# Altium PCB display.PcbDoc
Units mm, origin at the board's own origin, x right, y up, seen from the top; angles counter-clockwise.
Board outline 96 x 26 mm, 2 copper layers (Top Layer, Bottom Layer); 17 components, 76 nets, 185 pads, 110 vias.
Unrouted connection lines stored in the file: 12.
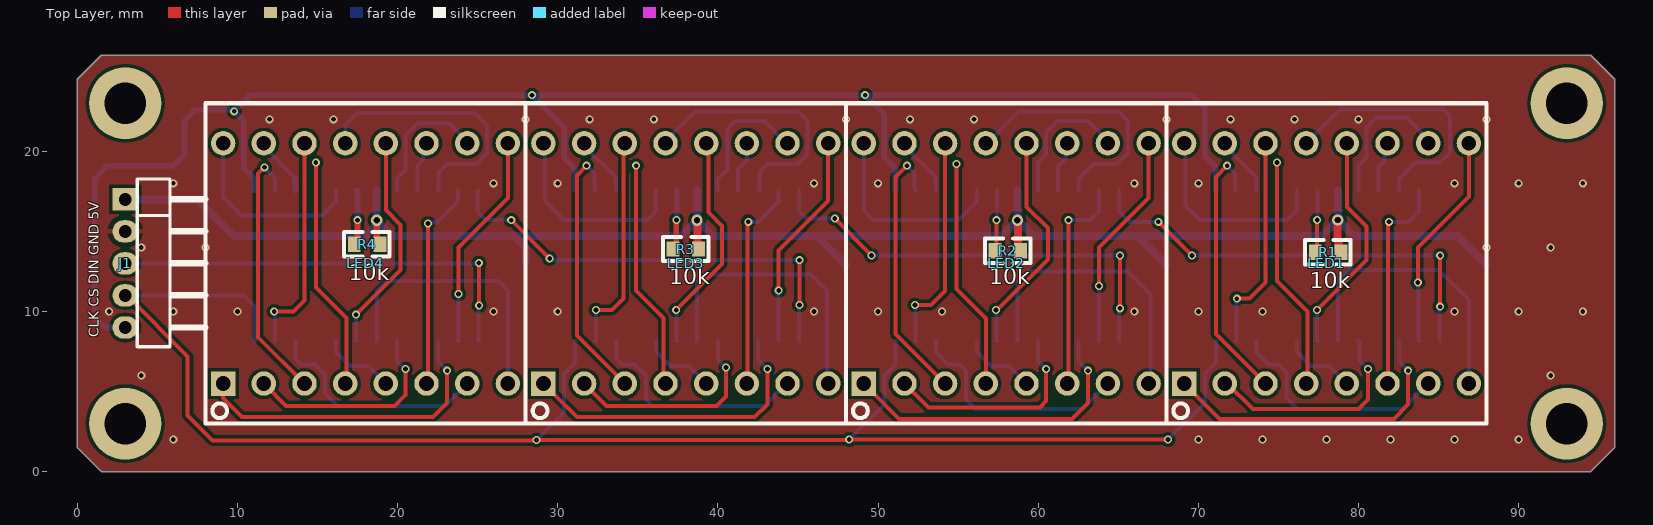
[diagram p0: Top Layer view]
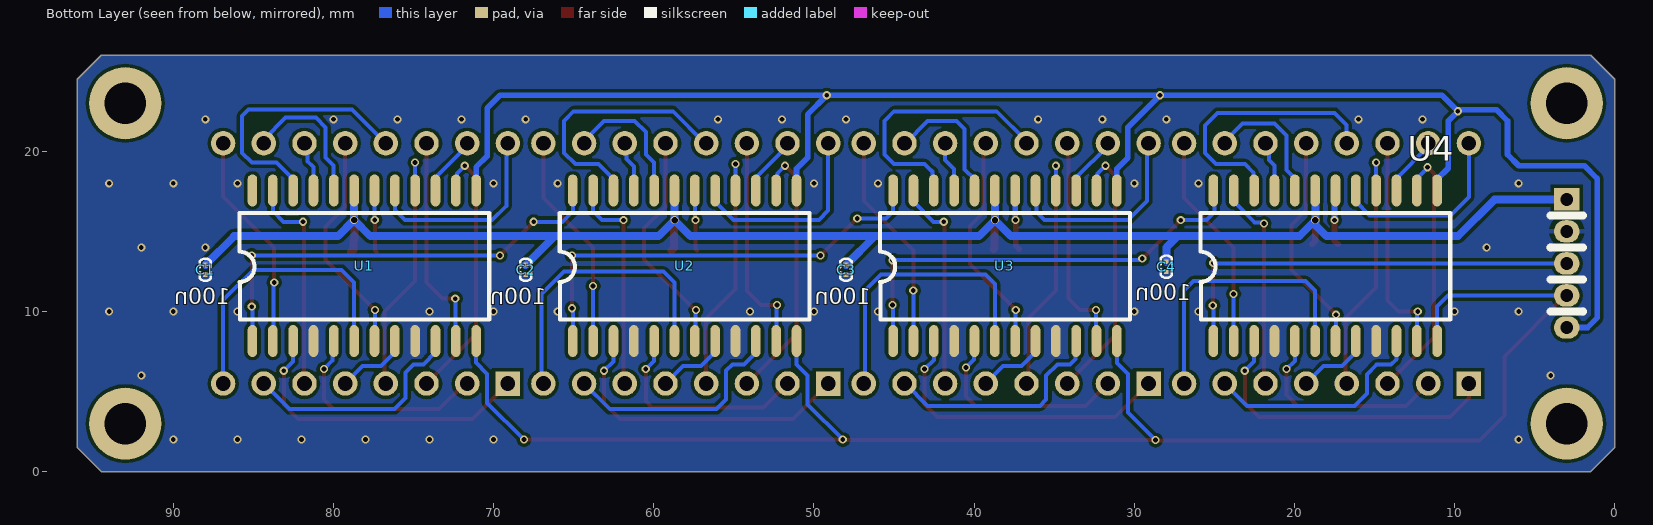
[diagram p1: Bottom Layer view, seen from below]
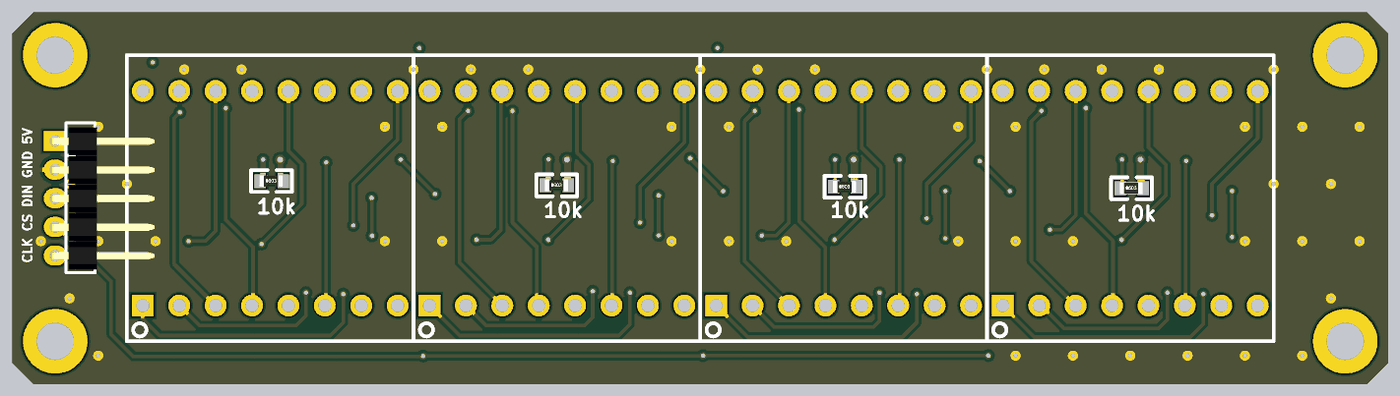
[diagram p2: 3D render of the assembled board from above, using the file's embedded part models]
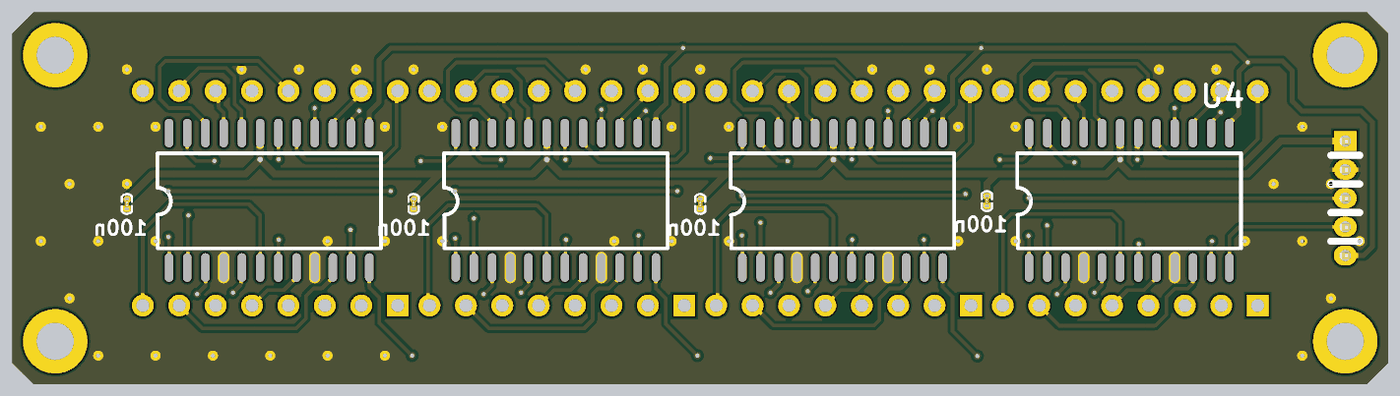
[diagram p3: 3D render of the assembled board from below, using the file's embedded part models]

## Layer stack, top to bottom
Top Solder: solder mask 0.0102, Solder Resist, Dk 3.5
Top Layer: signal copper 0.0356
Dielectric 1: dielectric 0.32, FR-4, Dk 4.8
Bottom Layer: signal copper 0.0356
Bottom Solder: solder mask 0.0102, Solder Resist, Dk 3.5

## Board outline
0,1.5 0,24.5 1.5,26 94.5,26 96,24.5 96,1.5 94.5,0 1.5,0

## Design rules (kind name [scope] priority, off if disabled: settings)
Clearance [All] p1: gap=0.2 ignorepadtopadclearanceinfootprint=FALSE except(0: Arc-Hole Track-Hole SMDPad-Hole THPad-Hole Via-Hole Fill-Hole Poly-Hole Region-Hole Text-Hole)
ComponentClearance [All] p1 off: gap=0.254 collisioncheckmode=3 verticalgap=0.254 showdistances=FALSE
HoleSize [All] p1: absolutevalues=TRUE maxlimit=10 minlimit=0.025 maxpercent=80.000 minpercent=20.000
HoleToHoleClearance [All] p1: gap=0.2 allowstackedmicrovias=TRUE
MinimumSolderMaskSliver [All] p1: minsoldermaskwidth=0.01
PolygonConnect PolygonConnect_2 [InNet('VIN')] p1: connectstyle=Direct reliefconductorwidth=0.254 reliefentries=4 polygonreliefangle="90 Angle" airgapwidth=0.254
PolygonConnect PolygonConnect_1 [IsVia] p2: connectstyle=Direct reliefconductorwidth=0.254 reliefentries=4 polygonreliefangle="90 Angle" airgapwidth=0.254
PolygonConnect [All] p3: thpad.connectstyle=Relief thpad.reliefconductorwidth=0.3 thpad.reliefentries=4 thpad.polygonreliefangle="90 Angle" thpad.airgapwidth=0.3 smdpad.connectstyle=Direct smdpad.reliefconductorwidth=0.2 smdpad.reliefentries=4 smdpad.polygonreliefangle="90 Angle" smdpad.airgapwidth=0.2 via.connectstyle=Relief via.reliefconductorwidth=0.2 via.reliefentries=4 via.polygonreliefangle="90 Angle" via.airgapwidth=0.2
RoutingVias [All] p1: holewidth=0.3 width=0.5 viastyle="Through Hole" minholewidth=0.3 minwidth=0.5 maxholewidth=0.711 maxwidth=1.27
SilkToSilkClearance [All] p1: silktosilkclearance=0
SilkToSolderMaskClearance [IsPad] p1: minsilkscreentomaskgap=0 clearancetoexposedcopper=TRUE
SolderMaskExpansion [All] p1: expansion=0.102 istentingtop=FALSE
Width Width_VIN [InNet('VIN')] p1: maxlimit=10 minlimit=0.254 preferedwidth=1
Width Width_5V [InNet('5V')] p2: maxlimit=5 minlimit=0.2 preferedwidth=0.5
Width Width_3V3 [InNet('3V3')] p3: maxlimit=5 minlimit=0.2 preferedwidth=0.35
Width Width_1 [All] p4: maxlimit=1 minlimit=0.2 preferedwidth=0.25
24 further rules are at their usual default settings.

## Components (designator, comment, footprint, x,y, rotation, side; value= is the part's Value field where it differs from the comment)
C1 "100nF" 0201C 88,12.3 r90 bottom
C2 "100nF" 0201C 68,12.3 r90 bottom
C3 "100nF" 0201C 48,12.3 r90 bottom
C4 "100nF" 0201C 28,12.5 r90 bottom
J1 "Pin HDR1X5" "Pin HDR1X5/2mm-W" 3,17 r270 top
LED1 "SLD0888DWC1BY" 点阵2CM 78,13 r0 top
LED2 "SLD0888DWC1BY" 点阵2CM 58,13 r0 top
LED3 "SLD0888DWC1BY" 点阵2CM 38,13 r0 top
LED4 "SLD0888DWC1BY" 点阵2CM 18,13 r0 top
R1 "10k" 0603R 77.3,13.7 r0 top
R2 "10k" 0603R 57.3,13.8 r0 top
R3 "10k" 0603R 37.2,13.9 r0 top
R4 "10k" 0603R 17.3,14.2 r0 top
U1 "MAX7219EWG+T" MAX7219EWG 78,13 r180 bottom
U2 "MAX7219EWG+T" MAX7219EWG 58,13 r180 bottom
U3 "MAX7219EWG+T" MAX7219EWG 38,13 r180 bottom
U4 "MAX7219EWG+T" MAX7219EWG 18,13 r180 bottom

## Footprints (in the part's own frame and the unit in brackets; to place one, negate y for a bottom-side part, rotate by r counter-clockwise, add the part's x,y. Pads: shape width x height; smd on the part's side, far side on the other; paste and mask are expansions set on the pad)
0201C [mm]
  rect 0.3x0.3 smd: 1(0,0) 2(0.6,0)
  silkscreen extent -0.39,-0.35 0.99,0.35, body extent 0,-0.15 0.61,0.15, height 0.31
0603R [mm]
  rect 0.8x0.965 smd: 1(0,0) 2(1.6,0)
  silkscreen extent -0.63,-0.76 2.21,0.76, body extent -0.04,-0.41 1.56,0.41, height 0.45
MAX7219EWG [mm]
  oval 0.6x1.998 smd: 1(-7.059,-4.843) 2(-5.789,-4.843) 3(-4.519,-4.843) 4(-3.249,-4.843) 5(-1.979,-4.843) 6(-0.709,-4.843) 7(0.561,-4.843) 8(1.831,-4.843) 9(3.101,-4.843) 10(4.371,-4.843) 11(5.641,-4.843) 12(6.911,-4.843) 13(6.911,4.557) 14(5.641,4.557) 15(4.371,4.557) 16(3.101,4.557) 17(1.831,4.557) 18(0.561,4.557) 19(-0.709,4.557) 20(-1.979,4.557) 21(-3.249,4.557) 22(-4.519,4.557) 23(-5.789,4.557) 24(-7.059,4.557)
  silkscreen extent -7.87,-3.5 7.73,3.15
"Pin HDR1X5/2mm-W" [mm]
  rect 1.4x1.6 hole 0.8: 1(0,0)
  oval 1.4x1.6 hole 0.8: 2(2,0) 3(4,0) 4(6,0) 5(8,0)
  silkscreen extent -1.27,0.75 9.2,5, body extent -0.95,-0.32 9,6.93, height 2
点阵2CM [mil]
  rect 60x60 hole 36: 1(-350,-295.28)
  round 60 hole 36: 2(-250,-295.28) 3(-150,-295.28) 4(-50,-295.28) 5(50,-295.28) 6(150,-295.28) 7(250,-295.28) 8(350,-295.28) 9(350,295.27) 10(250,295.28) 11(150,295.28) 12(50,295.28) 13(-50,295.28) 14(-150,295.28) 15(-250,295.28) 16(-350,295.28)
  silkscreen extent -394,-394 394,394

## Part data
C1 C2 C3 C4: library part CAP, "无极性电容"
LED1 LED2 LED3 LED4: BOM_Manufacturer=SUNLIGHT, BOM_Manufacturer Part=SLD0888DWC1BY, BOM_Supplier=LCSC, BOM_Supplier Part=C225986, Contributor=LCSC, spicePre=L, spiceSymbolName=SLD0888DWC1BY
R1 R2 R3 R4: library part RES
U1 U2 U3 U4: BOM_JLCPCB SMD=Yes, BOM_Manufacturer=MAXIM, BOM_Manufacturer Part=MAX7219EWG+T, BOM_Supplier=LCSC, BOM_Supplier Part=C52476, image=//image.lceda.cn/szlcsc/C52476.jpg, SMT Type=Extend, spicePre=U, spiceSymbolName=MAX7219EWG+T

## Free pads (board coordinates)
  round 4.5 hole 2.6: 2(3,3) 2(3,23) 2(93,3) 2(93,23)

## Via types
v1: diameter 0.5/0.508 (per signal layer), hole 0.3, Top Layer to Bottom Layer, tented both sides, 56 vias
v2: diameter 0.5, hole 0.3, Top Layer to Bottom Layer, 50 vias
v3: diameter 0.7/0.508 (per signal layer), hole 0.4, Top Layer to Bottom Layer, tented both sides, 4 vias

## Nets (pads, with @x,y where several pads share a name; then routed paths per layer and width w, separated by ;. In a path a pad name is that pad's centre, name@x,y a point inside that pad or via, vN(x,y) a via of type N, cw(c..) or ccw(c..) an arc to the next point about the centre after c; other vN are vias at no path point)
1DIG0: LED1.9 U1.2 | length 13.7
  Top Layer w0.25: v1(83.7,11.8) 83.7,14 86.89,17.19 LED1.9
  Bottom Layer w0.25: v1(83.7,11.8) 83.744,11.756 83.744,8.201 U1.2
1DIG1: LED1.14 U1.11 | length 13.6
  Top Layer w0.25: v1(72.4,10.8) 73.2,10.8 74.2,11.8 74.2,20.49 LED1.14
  Bottom Layer w0.25: U1.11 72.379,8.178 72.379,10.779 v1(72.4,10.8)
1DIG2: LED1.8 U1.6 | length 18.2
  Bottom Layer w0.25: U1.6 78.709,11.809 79.5,12.6 85,12.6 86.89,10.71 LED1.8
1DIG3: LED1.12 U1.7 | length 14.2
  Top Layer w0.25: v1(77.4,10.1) 80.5,13.2 80.5,15.3 79.27,16.53 LED1.12
  Bottom Layer w0.25: v1(77.4,10.1) 77.419,10.081 77.419,8.176 U1.7
1DIG4: LED1.1 U1.3 | length 19.5
  Top Layer w0.25: LED1.1@69.11,5.5 71.31,3.3 82.2,3.3 83.1,4.2 v1(83.1,6.3)
  Bottom Layer w0.25: U1.3 82.519,6.881 v1(83.1,6.3)
1DIG5: LED1.7 U1.10 | length 14.5
  Bottom Layer w0.25: U1.10 73.629,7.458 74.387,6.7 75,6.7 75.5,6.2 75.5,4.6 76.2,3.9 82.75,3.9 LED1.7
1DIG6: LED1.2 U1.5 | length 13.8
  Top Layer w0.25: LED1.2 71.8,5.5 73.4,3.9 80,3.9 80.6,4.5 v1(80.6,6.4)
  Bottom Layer w0.25: U1.5 80.046,8.09 80.046,6.954 v1(80.6,6.4)
1DIG7: LED1.5 U1.8 | length 4.6
  Bottom Layer w0.25: U1.8 76.169,7.458 77.04,6.587 78.183,6.587 LED1.5
1SEGA: LED1.3 U1.14 | length 16.9
  Top Layer w0.25: v1(71.8,19.1) 71.1,18.4 71.1,8.59 LED1.3
  Bottom Layer w0.25: v1(71.8,19.1) 72.292,18.608 72.292,17.624 U1.14
1SEGB: LED1.4 U1.16 | length 16.4
  Top Layer w0.25: v1(74.9,19.3) 74.9,11.9 76.8,10 76.8,5.57 LED1.4
  Bottom Layer w0.25: U1.16 74.899,19.299 v1(74.9,19.3)
1SEGC: LED1.10 U1.20 | length 9.1
  Bottom Layer w0.25: U1.20 80,17.578 80,19.1 80.5,19.6 80.5,21.5 81.1,22.1 83,22.1 84.35,20.75 LED1.10
1SEGD: LED1.6 U1.23 | length 13.6
  Top Layer w0.25: LED1.6 81.855,5.545 81.855,15.555 v1(81.9,15.6)
  Bottom Layer w0.25: v1(81.9,15.6) 83.132,15.6 83.789,16.257 U1.23
1SEGDP: LED1.13 U1.22 | length 16.9
  Bottom Layer w0.25: LED1.13 78.83,22.6 85.3,22.6 85.7,22.2 85.7,19.9 85.1,19.3 83.563,19.3 82.519,18.256 U1.22
1SEGE: LED1.11 U1.21 | length 3.2
  Bottom Layer w0.25: U1.21 81.249,19.006 81.606,19.363 81.606,20.296 LED1.11
1SEGF: LED1.15 U1.15 | length 3.8
  Bottom Layer w0.25: LED1.15 71.65,20.33 73.629,18.351 U1.15
1SEGG: LED1.16 U1.17 | length 12.8
  Bottom Layer w0.25: LED1.16 69.2,20.41 69.2,16.6 70.1,15.7 75.526,15.7 76.169,16.343 U1.17
2DIG0: LED2.9 U2.2 | length 13.6
  Top Layer w0.25: v1(63.789,11.589) 63.8,11.6 63.8,14 66.89,17.09 LED2.9
  Bottom Layer w0.25: U2.2 v1(63.789,11.589) v1@63.8,11.6
2DIG1: LED2.14 U2.11 | length 13.7
  Top Layer w0.25: v1(52.3,10.4) 53.3,10.4 54.19,11.29 LED2.14
  Bottom Layer w0.25: v1(52.3,10.4) 52.329,10.371 52.329,8.186 U2.11
2DIG2: LED2.8 U2.6 | length 18.5
  Bottom Layer w0.25: U2.6 58.709,11.809 59.4,12.5 65.6,12.5 67,11.1 67,5.61 LED2.8
2DIG3: LED2.12 U2.7 | length 14.4
  Top Layer w0.25: v1@57.3,10.1 v1(57.371,10.1) 57.442,10.1 60.6,13.258 60.6,15.2 59.27,16.53 LED2.12
  Bottom Layer w0.25: v1(57.371,10.1) 57.405,10.066 57.405,8.191 U2.7
2DIG4: LED2.1 U2.3 | length 19.4
  Top Layer w0.25: LED2.1@49.11,5.5 49.747,4.863 51.31,3.3 62.1,3.3 63.1,4.3 v1(63.1,6.3)
  Bottom Layer w0.25: U2.3 62.519,6.881 v1(63.1,6.3)
2DIG5: LED2.7 U2.10 | length 14.6
  Bottom Layer w0.25: U2.10 53.629,7.44 54.369,6.7 55.1,6.7 55.5,6.3 55.5,4.5 56.1,3.9 62.75,3.9 LED2.7
2DIG6: LED2.2 U2.5 | length 13.6
  Top Layer w0.25: LED2.2 53.15,4 60.1,4 60.5,4.4 v1(60.5,6.4)
  Bottom Layer w0.25: U2.5 59.979,6.921 v1(60.5,6.4)
2DIG7: LED2.5 U2.8 | length 4.6
  Bottom Layer w0.25: U2.8 56.169,7.458 57.04,6.587 58.183,6.587 LED2.5
2SEGA: LED2.3 U2.14 | length 16.9
  Top Layer w0.25: v1(51.8,19.1) 51.1,18.4 51.1,8.59 LED2.3
  Bottom Layer w0.25: v1(51.8,19.1) 52.292,18.608 52.292,17.624 U2.14
2SEGB: LED2.4 U2.16 | length 16.1
  Top Layer w0.25: v1(54.899,19.199) 54.899,11.401 56.73,9.57 LED2.4
  Bottom Layer w0.25: U2.16 v1(54.899,19.199) v1(54.899,19.199)
2SEGC: LED2.10 U2.20 | length 8.7
  Bottom Layer w0.25: U2.20 60,17.578 60,19.3 60.5,19.8 60.5,21.2 61.2,21.9 63.1,21.9 64.35,20.65 LED2.10
2SEGD: LED2.6 U2.23 | length 13.7
  Top Layer w0.25: LED2.6 61.9,5.59 v1(61.9,15.7)
  Bottom Layer w0.25: v1(61.9,15.7) 63.232,15.7 63.789,16.257 U2.23
2SEGDP: LED2.13 U2.22 | length 16.4
  Bottom Layer w0.25: LED2.13 56.8,20.5 58.8,22.5 65,22.5 65.6,21.9 65.6,19.9 64.9,19.2 63.463,19.2 62.519,18.256 U2.22
2SEGE: LED2.11 U2.21 | length 3.2
  Bottom Layer w0.25: U2.21 61.249,19.049 61.71,19.51 61.71,20.4 LED2.11
2SEGF: LED2.15 U2.15 | length 3.8
  Bottom Layer w0.25: LED2.15 51.65,20.33 53.629,18.351 U2.15
2SEGG: LED2.16 U2.17 | length 12.7
  Bottom Layer w0.25: LED2.16 49.11,16.29 49.7,15.7 55.011,15.7 56.169,16.858 U2.17
3DIG0: LED3.9 U3.2 | length 13.6
  Top Layer w0.25: v1(43.8,11.3) 43.8,13.8 46.89,16.89 LED3.9
  Bottom Layer w0.25: U3.2 43.794,8.163 43.794,11.294 v1(43.8,11.3)
3DIG1: LED3.14 U3.11 | length 13.7
  Top Layer w0.25: v1(32.4,10.1) 33.4,10.1 34.1,10.8 34.1,20.41 LED3.14
  Bottom Layer w0.25: U3.11 32.379,8.178 32.379,10.079 v1(32.4,10.1)
3DIG2: LED3.8 U3.6 | length 18.1
  Bottom Layer w0.25: U3.6 38.709,11.709 39.3,12.3 45.8,12.3 46.8,11.3 46.8,5.59 LED3.8
3DIG3: LED3.12 U3.7 | length 13.9
  Top Layer w0.25: v1(37.4,10.1) 40.25,12.95 40.25,15.35 39.4,16.2 39.4,20.37 LED3.12
  Bottom Layer w0.25: v1(37.4,10.1) 37.419,10.081 37.419,8.176 U3.7
3DIG4: LED3.1 U3.3 | length 19.4
  Top Layer w0.25: LED3.1@29.11,5.5 29.747,4.863 31.21,3.4 42.3,3.4 43.1,4.2 v1(43.1,6.4)
  Bottom Layer w0.25: U3.3 42.519,6.981 v1(43.1,6.4)
3DIG5: LED3.7 U3.10 | length 14.5
  Bottom Layer w0.25: U3.10 33.663,8.123 33.663,7.037 34,6.7 34.8,6.7 35.5,6 35.5,4.5 35.9,4.1 42.9,4.1 44.3,5.5 LED3.7
3DIG6: LED3.2 U3.5 | length 13.4
  Top Layer w0.25: LED3.2 33.05,4.1 39.9,4.1 40.5,4.7 v1(40.5,6.5)
  Bottom Layer w0.25: U3.5 40,8.136 40,7 v1(40.5,6.5)
3DIG7: LED3.5 U3.8 | length 4.6
  Bottom Layer w0.25: U3.8 36.169,7.458 37.04,6.587 38.183,6.587 LED3.5
3SEGA: LED3.3 U3.14 | length 16.9
  Top Layer w0.25: v1(31.8,19.1) 31.2,18.5 31.2,8.5 34.19,5.51 LED3.3
  Bottom Layer w0.25: v1(31.8,19.1) 32.292,18.608 32.292,17.624 U3.14
3SEGB: LED3.4 U3.16 | length 15.9
  Top Layer w0.25: v1(34.9,19.1) 34.9,11.3 36.6,9.6 36.6,5.63 LED3.4
  Bottom Layer w0.25: U3.16@34.899,17.557 v1(34.9,19.1)
3SEGC: LED3.10 U3.20 | length 8.6
  Bottom Layer w0.25: U3.20 39.979,18.256 40.6,18.877 40.6,21.4 41.1,21.9 42.9,21.9 44.3,20.5 LED3.10
3SEGD: LED3.6 U3.23 | length 13.2
  Top Layer w0.25: LED3.6 41.855,5.545 41.855,15.555 v1(41.9,15.6)
  Bottom Layer w0.25: v1(41.9,15.6) 42.531,15.6 43.789,16.858 U3.23
3SEGDP: LED3.13 U3.22 | length 16.8
  Bottom Layer w0.25: LED3.13 36.73,20.63 38.6,22.5 45,22.5 45.6,21.9 45.6,19.8 45,19.2 43.1,19.2 42.7,18.8 42.646,18.8 42.586,18.74 42.586,17.624 U3.22
3SEGE: LED3.11 U3.21 | length 3.2
  Bottom Layer w0.25: U3.21 41.249,18.884 41.81,19.445 LED3.11
3SEGF: LED3.15 U3.15 | length 3.8
  Bottom Layer w0.25: LED3.15 31.65,20.33 33.629,18.351 U3.15
3SEGG: LED3.16 U3.17 | length 12.6
  Bottom Layer w0.25: LED3.16 29.2,20.41 29.2,16.9 30.4,15.7 35.6,15.7 36.102,16.202 36.102,17.49 U3.17
4DIG0: LED4.9 U4.2 | length 13.6
  Top Layer w0.25: v1(23.8,11.1) 23.8,14 26.89,17.09 LED4.9
  Bottom Layer w0.25: U4.2 23.794,8.163 23.794,11.094 v1(23.8,11.1)
4DIG1: LED4.14 U4.11 | length 13.9
  Top Layer w0.25: v1(12.3,10) 13.5,10 14.19,10.69 LED4.14
  Bottom Layer w0.25: v1(12.3,10) 12.3,9.966 12.359,9.907 U4.11
4DIG2: LED4.8 U4.6 | length 17.6
  Bottom Layer w0.25: U4.6 18.71,11.31 19.3,11.9 26.3,11.9 26.89,11.31 LED4.8
4DIG3: LED4.12 U4.7 | length 13.9
  Top Layer w0.25: v1(17.4,9.8) 20.2,12.6 20.2,15.4 19.27,16.33 LED4.12
  Bottom Layer w0.25: v1(17.4,9.8) 17.419,9.781 17.419,8.176 U4.7
4DIG4: LED4.1 U4.3 | length 19.9
  Top Layer w0.25: LED4.1 9.1,5.49 9.1,4.6 10.3,3.4 22.2,3.4 23.1,4.3 v1(23.1,6.3)
  Bottom Layer w0.25: U4.3 22.519,6.881 v1(23.1,6.3)
4DIG5: LED4.7 U4.10 | length 14.4
  Bottom Layer w0.25: U4.10 13.642,8.144 13.642,7.017 13.969,6.69 14.863,6.69 15.482,6.071 15.482,4.871 16.263,4.09 22.963,4.09 24.35,5.476 LED4.7
4DIG6: LED4.2 U4.5 | length 13.3
  Top Layer w0.25: LED4.2 13.05,4.1 19.8,4.1 20.5,4.8 v1(20.5,6.4)
  Bottom Layer w0.25: U4.5 19.979,6.921 v1(20.5,6.4)
4DIG7: LED4.5 U4.8 | length 4.6
  Bottom Layer w0.25: U4.8 16.169,7.458 17.04,6.587 18.183,6.587 LED4.5
4SEGA: LED4.3 U4.14 | length 16.6
  Top Layer w0.25: v1(11.7,19) 11.3,18.6 11.3,8.39 LED4.3
  Bottom Layer w0.25: v1(11.7,19) 11.7,18.957 12.359,18.298 U4.14
4SEGB: LED4.4 U4.16 | length 16.4
  Top Layer w0.25: v1(14.899,19.299) 14.899,11.501 16.8,9.6 16.8,5.57 LED4.4
  Bottom Layer w0.25: U4.16 v1(14.899,19.299) v1@14.9,19.3
4SEGC: LED4.10 U4.20 | length 8.4
  Bottom Layer w0.25: U4.20 19.979,18.315 20.5,18.836 20.5,21 21.25,21.75 23.25,21.75 24.35,20.65 LED4.10
4SEGD: LED4.6 U4.23 | length 13.2
  Top Layer w0.25: LED4.6 21.8,5.51 21.9,5.61 v1(21.9,15.5)
  Bottom Layer w0.25: v1(21.9,15.5) 21.949,15.549 22.48,15.549 23.789,16.858 U4.23
4SEGDP: LED4.13 U4.22 | length 17
  Bottom Layer w0.25: LED4.13 16.75,20.52 16.75,21.65 17.5,22.4 24.8,22.4 25.6,21.6 25.6,19.9 24.9,19.2 23.1,19.2 22.561,18.661 22.561,17.599 U4.22
4SEGE: LED4.11 U4.21 | length 3.2
  Bottom Layer w0.25: U4.21 21.249,19.127 21.591,19.47 21.591,20.281 LED4.11
4SEGF: LED4.15 U4.15 | length 3.8
  Bottom Layer w0.25: LED4.15@11.65,20.294 U4.15@13.629,18.315
  Bottom Layer w0.381: LED4.15@11.65,20.294 LED4.15 ; U4.15 U4.15@13.629,18.315
4SEGG: LED4.16 U4.17 | length 11.9
  Bottom Layer w0.25: LED4.16 9.11,17.14 10.25,16 15.311,16 16.169,16.858 U4.17
+5: C1.2 C2.2 C3.2 C4.2 J1.1 R1.2 R2.2 R3.2 R4.2 U1.19 U2.19 U3.19 U4.19 | length 112.1
  Top Layer w0.381: v3(18.7,15.7) 18.7,14.4 R4.2
  Top Layer w0.5: v3(38.7,15.7) 38.738,15.662 38.738,13.962 R3.2 ; v3(58.7,15.7) 58.7,15.646 58.75,15.596 58.75,13.95 R2.2 ; v3(78.709,15.709) 78.7,15.7 78.7,14.5 78.75,14.45 78.75,13.85 R1.2
  Bottom Layer w0.5: J1.1 7.5,17 9.8,14.7 18,14.7 18.698,15.398 v3(18.7,15.7) v3(18.7,15.7) ; U4.19 18.7,17.548 v3(18.7,15.7) ; C4.2 28,14 27.3,14.7 ; U3.19 38.709,15.709 v3(38.7,15.7) ; C3.2 46.2,14.7 ; U2.19 58.7,17.548 v3(58.7,15.7) ; C2.2 67.2,13.7 66.2,14.7 ; U1.19 v3(78.709,15.709) ; C1.2 86.2,14.7 79.718,14.7 v3(78.709,15.709) ; v3(18.7,15.7) 19.7,14.7 27.3,14.7 ; 27.3,14.7 37.7,14.7 v3(38.7,15.7) ; v3(38.7,15.7) 39.7,14.7 46.2,14.7 ; 46.2,14.7 57.7,14.7 v3(58.7,15.7) ; v3(58.7,15.7) 59.7,14.7 66.2,14.7 ; 66.2,14.7 77.7,14.7 v3(78.709,15.709)
CLK: J1.5 U1.13 U2.13 U3.13 U4.13 | length 108.6
  Bottom Layer w0.35: J1.5 1.7,9 1.1,9.6 1.1,18.3 1.9,19.1 6,19.1 6.7,19.8 6.7,21.9 7.4,22.6 9.7,22.6 v1(9.8,22.5) ; U4.13 11.089,18.256 10.4,18.945 10.4,21.9 v1(9.8,22.5) ; U3.13 31.089,18.911 30.4,19.6 30.4,21.5 v1(28.4,23.5) ; U2.13 51.089,18.911 50.4,19.6 50.4,22.3 v1(49.2,23.5) ; U1.13 71.089,19.011 70.4,19.7 70.4,22.7 69.6,23.5 v1(49.2,23.5) ; v1(9.8,22.5) 10.8,23.5 v1(28.4,23.5) ; v1(28.4,23.5) v1(49.2,23.5)
CS: J1.4 U1.12 U2.12 U3.12 U4.12 | length 103.5
  Top Layer w0.25: J1.4 3.1,11 6.9,7.2 6.9,3.5 8.462,1.938 28.638,1.938 v1(28.669,1.969) v1@48.131,1.969 ; v1(48.2,2) v1(68.1,2)
  Bottom Layer w0.25: J1.4 10.4,11 11.089,10.311 U4.12 ; v1(28.669,1.969) 30.4,3.7 30.4,6.1 31.089,6.789 U3.12 ; v1(48.2,2) 50.4,4.2 50.4,6 51.1,6.7 51.1,8.146 U2.12 ; v1(68.1,2) 70.4,4.3 70.4,6.1 71.1,6.8 71.1,8.146 U1.12
DIN: J1.3 U4.1 | length 27
  Top Layer w0.25: v1(25.075,13.025) 25.1,13 v1(25.1,10.371)
  Bottom Layer w0.25: J1.3 25.05,13 v1(25.075,13.025) ; U4.1 25.059,10.33 v1(25.1,10.371)
GND: C1.1 C2.1 C3.1 C4.1 J1.2 U1.4 U1.9 U2.4 U2.9 U3.4 U3.9 U4.4 U4.9
  other v2: 6,2 70,2 74,2 78,2 82,2 86,2 90,2 4,6 92,6 2,10 6,10 10,10 26,10 30,10 46,10 50,10 54,10 66,10 70,10 74,10 86,10 90,10 94,10 4,14 8,14 88,14 92,14 6,18 26,18 30,18 46,18 50,18 66,18 70,18 86,18 90,18 94,18 12,22 16,22 28,22 32,22 36,22 48,22 52,22 56,22 68,22 72,22 76,22 80,22 88,22
NetR1_1: R1.1 U1.18 | length 3.9
  Top Layer w0.25: R1.1 77.419,13.819 v1(77.419,15.719)
  Bottom Layer w0.25: v1@77.4,15.7 v1(77.419,15.719) 77.439,15.739 U1.18
NetR2_1: R2.1 U2.18 | length 3.8
  Top Layer w0.25: R2.1 57.4,13.9 v1(57.4,15.7)
  Bottom Layer w0.25: v1(57.4,15.7) 57.439,15.739 U2.18
NetR3_1: R3.1 U3.18 | length 3.8
  Top Layer w0.35: R3.1 37.391,14.091 37.391,15.691 v1(37.419,15.719)
  Bottom Layer w0.35: v1@37.4,15.7 v1(37.419,15.719) 37.439,15.739 U3.18
NetR4_1: R4.1 U4.18 | length 3.5
  Top Layer w0.381: R4.1 17.5,14.4 v1(17.5,15.7)
  Bottom Layer w0.381: U4.18 17.5,17.496 v1(17.5,15.7)
NetU1_1: U1.1 U2.24 | length 27.8
  Top Layer w0.25: v1(67.5,15.6) v1(69.6,13.5) ; v1(85.1,10.3) v1(85.1,13.5)
  Bottom Layer w0.25: U2.24 65.059,16.257 65.716,15.6 v1(67.5,15.6) ; v1(69.6,13.5) v1(85.1,13.5) ; U1.1 85.059,10.259 v1(85.1,10.3)
NetU2_1: U2.1 U3.24 | length 27.9
  Top Layer w0.25: v1(47.3,15.8) v1(49.6,13.5) ; v1(65.1,10.2) v1(65.1,13.5)
  Bottom Layer w0.25: U3.24 45.059,16.241 45.5,15.8 v1(47.3,15.8) ; v1(49.6,13.5) v1(65.1,13.5) ; U2.1 65.059,10.159 v1(65.1,10.2)
NetU3_1: U3.1 U4.24 | length 27.8
  Top Layer w0.25: v1(27.1,15.7) v1(29.5,13.3) ; v1(45.1,10.4) v1(45.1,13.2)
  Bottom Layer w0.25: U4.24 25,17.498 25,16.2 25.5,15.7 v1(27.1,15.7) ; v1(29.5,13.3) 29.6,13.2 v1(45.1,13.2) ; U3.1 45.059,10.359 v1(45.1,10.4)
pads on no net: U1.24

## Polygon pours and split planes (outlines as drawn)
GND on Bottom Layer "GND_L02_P-001" (solid, remove dead copper, pour order 1): 0,24.5 1.5,26 94.5,26 96,24.5 96,1.5 94.5,0 1.5,0 0,1.5
GND on Top Layer "GND_L02_P-001" (solid, remove dead copper, pour order 2): 0,24.5 1.5,26 94.5,26 96,24.5 96,1.5 94.5,0 1.5,0 0,1.5

## Silkscreen, mask and mechanical layers (free items; w line width, h text height)
Top Overlay:
  text "10k" at 16.95,11.95 h1
  text "10k" at 36.95,11.7 h1
  text "10k" at 56.95,11.7 h1
  text "10k" at 76.95,11.45 h1
  text "CLK CS DIN GND 5V" at 1.36,8.39 h0.62 r90
Bottom Overlay:
  text "100n" at 26.45,10.7 h1
  text "100n" at 46.45,10.45 h1
  text "100n" at 66.7,10.45 h1
  text "100n" at 86.45,10.45 h1
Mechanical 1:
  the board outline again, w0.254